# Allegro board seniordesignboard.brd
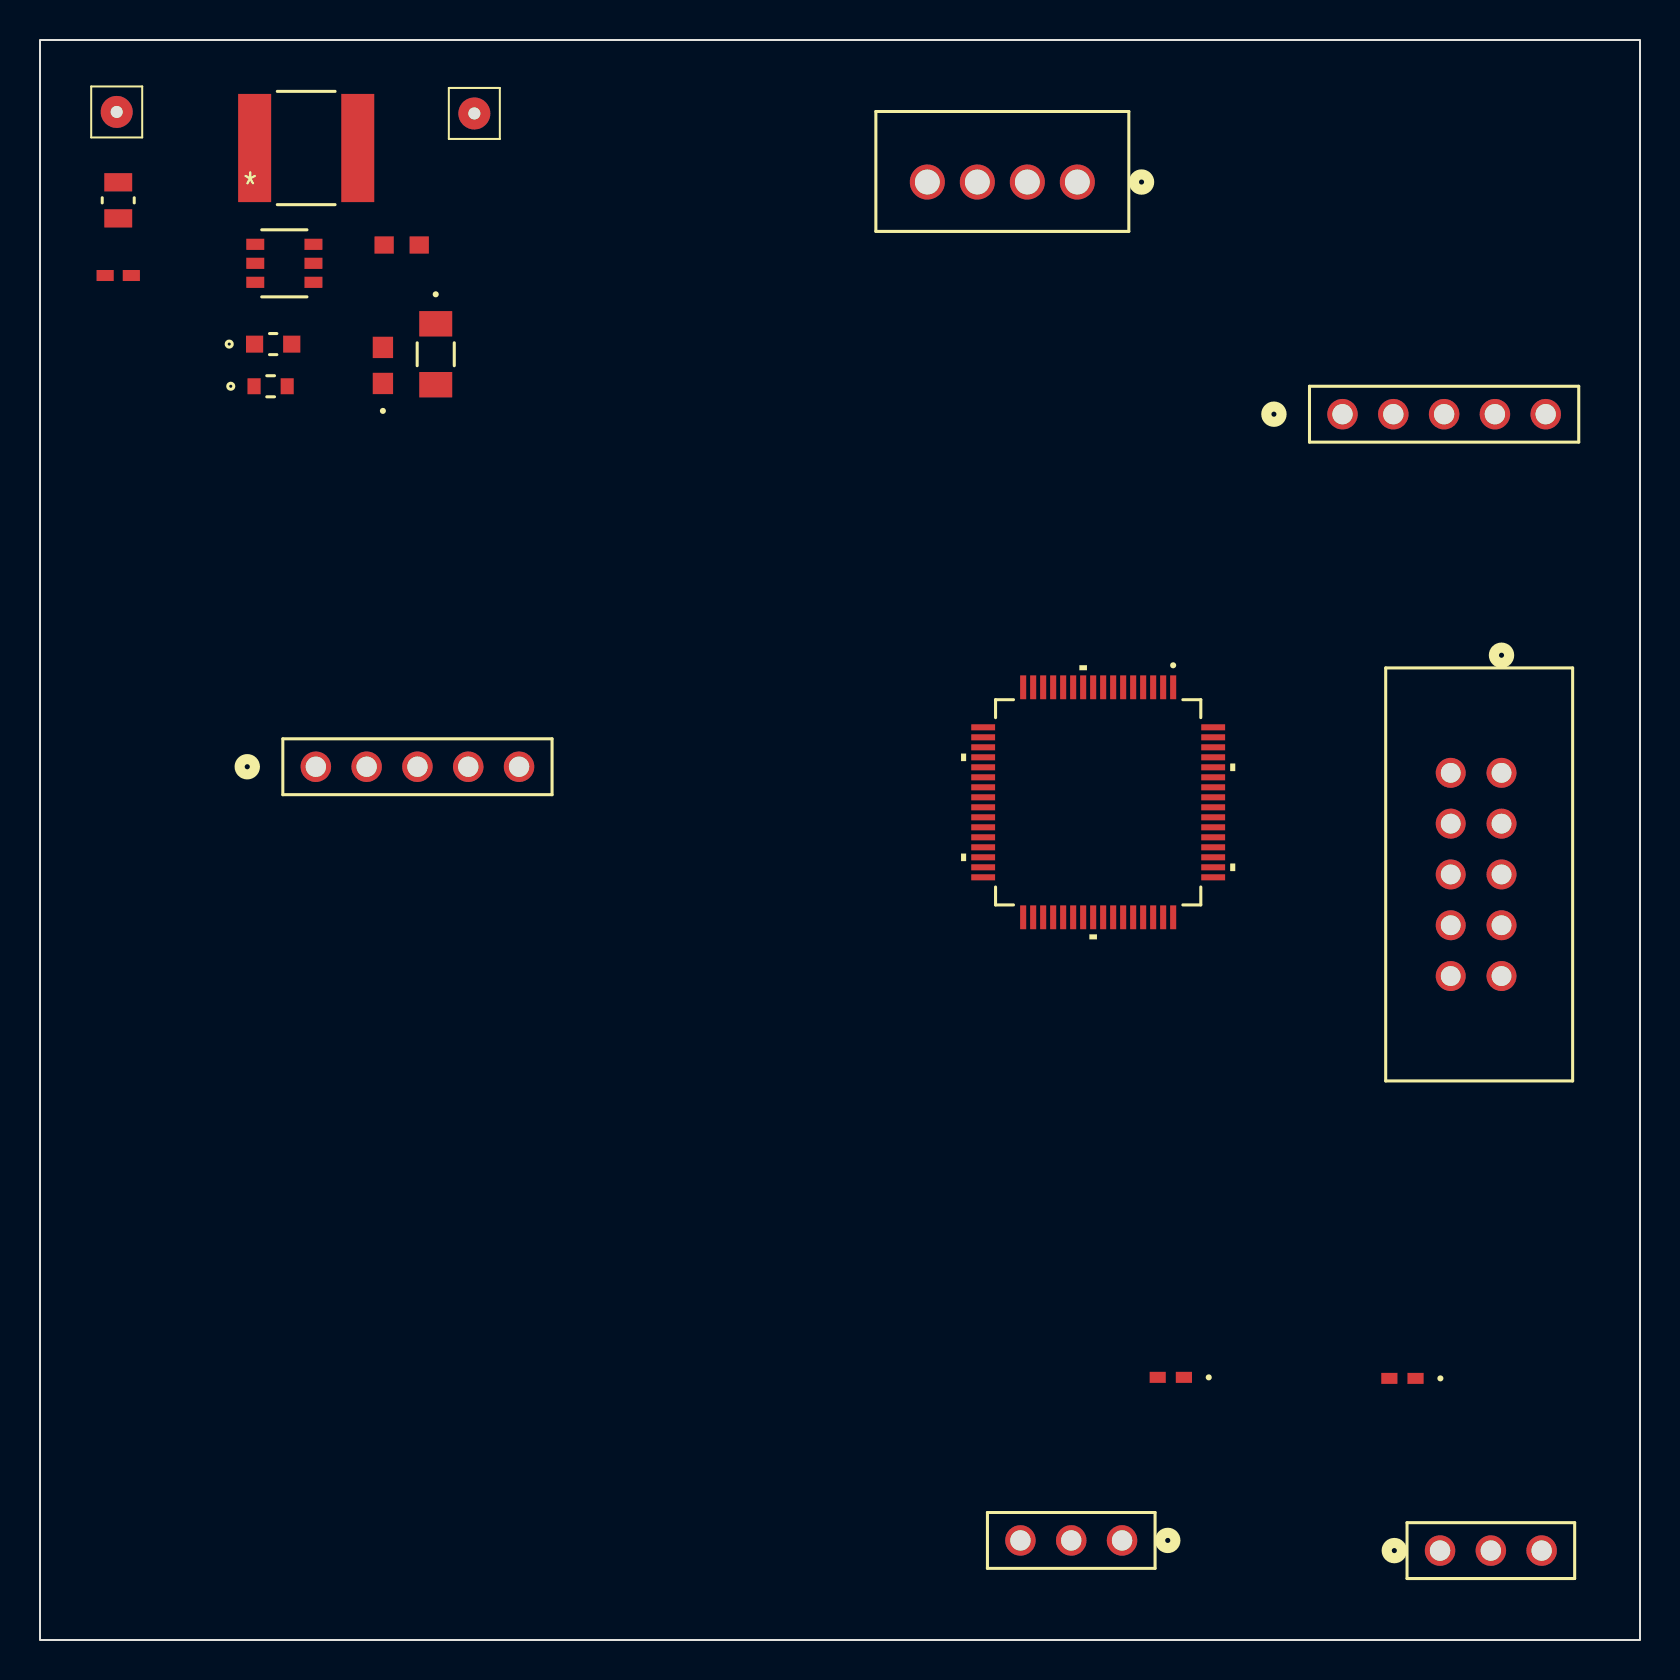
[diagram p0: board, top side]
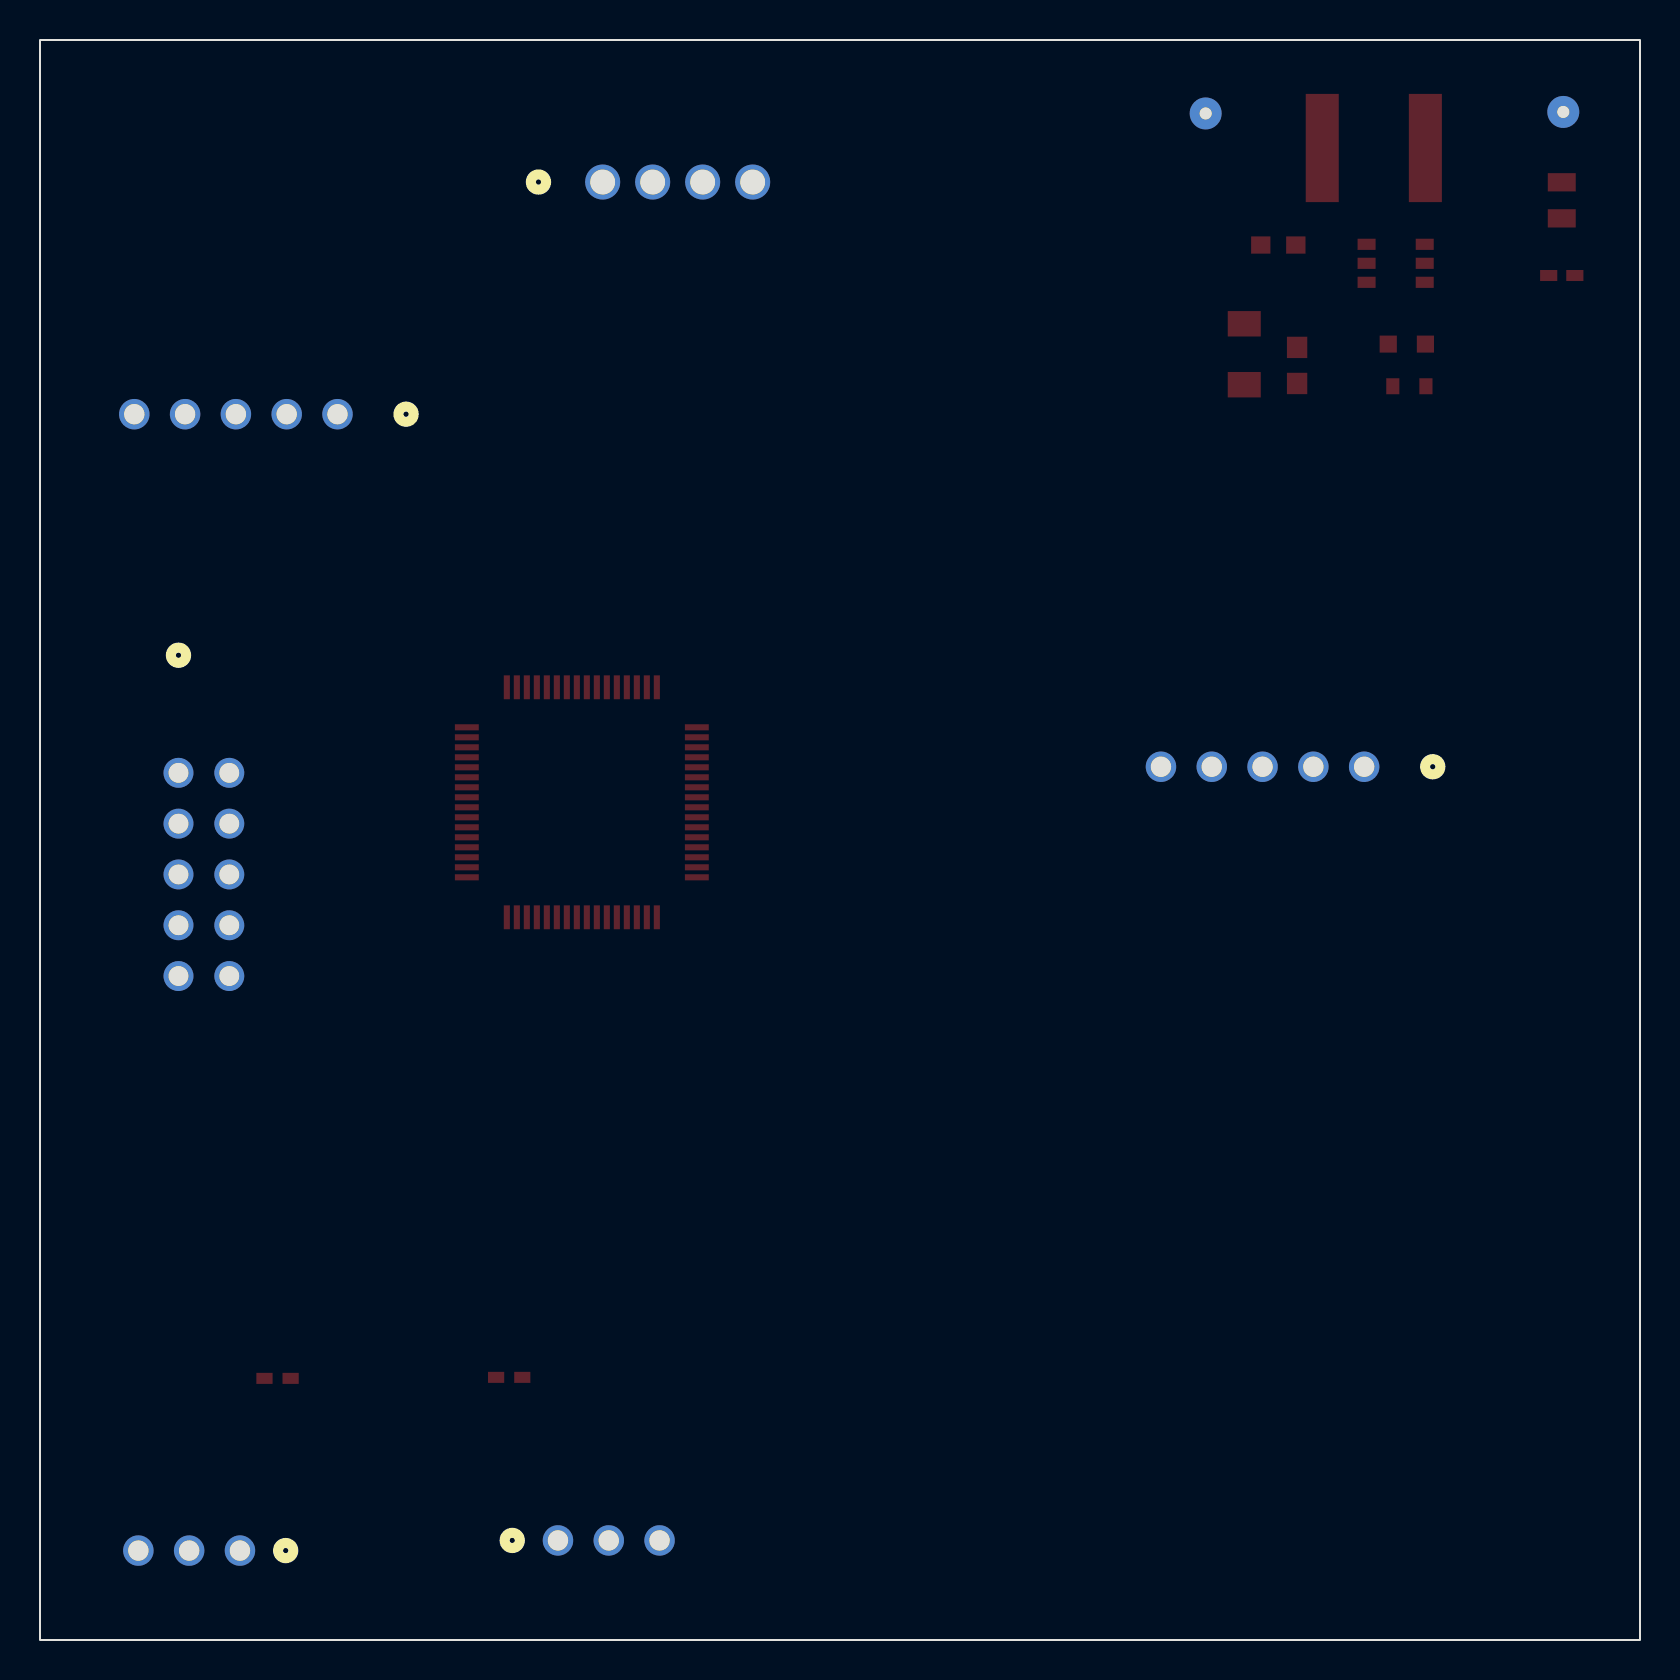
[diagram p1: board, bottom side, seen from below]

Outline 80 x 80 mm; copper layers: TOP, BOTTOM. Coordinates in mm from the lower left corner of the outline.
Outline path: rectangle 0,0 80,80

## Design rules (mm)
constraint set DEFAULT: min track width 0.305

## Placement (name value [footprint] x y rotation side)
C2  100n  [CAP_CL05_SAM-M]  68.12 13.08 180 top
C4  100n  [CAP_CL05_SAM-M]  56.54 13.13 180 top
C12  .1uf  [CAP_CL10_SAM-M]  11.66 64.8 0 top
C14  470pF  [CAP_0603G_AVX-M]  17.15 63.73 90 top
CANHEADER  CONN_B4B-XH-A  [CONN_B4B-XH-A_JST]  51.87 72.9 0 top
CIN  10uF  [CAP_NTS_55_2P8T_NIP]  13.31 74.6 180 top
COUT  10uf  [G-31_MUR-M]  19.79 64.29 270 top
GND  Battery-  [AMV_CON1]  21.72 76.33 0 top
GPSMODULE  CONN5_1LFBN-RC  [CONN5_1LFBN-RC_SUL]  13.79 43.66 0 top
JTAG  CONN_010P_000C_1  [CONN_SBH11-PBPC-D05-ST-BK_SUL]  73.08 43.36 270 top
L1  4.7uH  [IND_1608_TDK]  11.53 62.69 0 top
LORAMODULE  CONN5_1LFBN-RC  [CONN5_1LFBN-RC_SUL]  65.13 61.29 0 top
R2  4.7K  [RC0603N_YAG-M]  18.08 69.75 0 top
R4  5.1K  [RC0402N_PAN-M]  3.91 68.22 180 top
R5  30K  [RES_R0805_ROM-M]  3.91 71.98 270 top
SPEEDCONTROLLER  CONN_PPTC031  [CONN_PPTC031_SUL]  70 4.47 180 top
STEERINGSERVO  CONN_PPTC031  [CONN_PPTC031_SUL]  54.1 4.98 0 top
U2  STM32F4XXR2  [LQFP64-10X10MM]  52.91 41.88 270 top
U6  R1240N001x  [SOT-23-6W_PE-SOT23-6W-0512_NMD]  12.22 68.83 0 top
VIN  Battery+  [AMV_CON1]  3.84 76.4 0 top

## Library data of the parts
C2 C4 C12 C14 COUT = C: User Part Number: PN; Tolerance: TOL
CANHEADER = B4B-XH-A: User Part Number: PN; Tolerance: TOL
CIN = KTS500B106M55N0T00: User Part Number: PN; Tolerance: TOL
GND VIN = CON1
GPSMODULE LORAMODULE = PPTC051LFBN-RC: User Part Number: PN; Tolerance: TOL
JTAG = SBH11-PBPC-D05-ST-BK: User Part Number: PN; Tolerance: TOL
L1 = SLF7045T-4R7M2R0-PF: User Part Number: PN; Tolerance: TOL
R2 R4 R5 = R: User Part Number: PN; Tolerance: TOL
SPEEDCONTROLLER STEERINGSERVO = PPTC031LFBN-RC: User Part Number: PN; Tolerance: TOL
U2 = STM32F446RET6TR: User Part Number: PN; Tolerance: TOL
U6 = R1240N001B-TR-FE: User Part Number: PN; Tolerance: TOL

## Footprints (pads in the part's own frame, mm; a bottom-side part is the same pattern mirrored in y, then rotated)
AMV_CON1
  round 1.6 hole 0.6: 1(0,0)
CAP_0603G_AVX-M
  rect 1.067x1.016 smd: 1(-0.902,0) 2(0.902,0)
CAP_CL05_SAM-M
  rect 0.809x0.551 smd: 1(-0.654,0) 2(0.654,0)
CAP_CL10_SAM-M
  rect 0.859x0.851 smd: 1(-0.929,0) 2(0.929,0)
CAP_NTS_55_2P8T_NIP
  rect 1.651x5.41 smd: 1(-2.578,0) 2(2.578,0)
CONN5_1LFBN-RC_SUL
  round 1.524 hole 1.016: 1(0,0) 2(2.54,0) 3(5.08,0) 4(7.62,0) 5(10.16,0)
CONN_B4B-XH-A_JST
  round 1.753 hole 1.245: 1(0,0) 2(-2.5,0) 3(-5,0) 4(-7.5,0)
CONN_PPTC031_SUL
  round 1.524 hole 1.016: 1(0,0) 2(-2.54,0) 3(-5.08,0)
CONN_SBH11-PBPC-D05-ST-BK_SUL
  round 1.499 hole 0.991: 1(0,0) 2(0,-2.54) 3(2.54,0) 4(2.54,-2.54) 5(5.08,0) 6(5.08,-2.54) 7(7.62,0) 8(7.62,-2.54) 9(10.16,0) 10(10.16,-2.54)
G-31_MUR-M
  rect 1.27x1.651 smd: 1(-1.524,0) 2(1.524,0)
IND_1608_TDK
  rect 0.656x0.8 smd: 1(-0.828,0) 2(0.828,0)
LQFP64-10X10MM
  rect 1.194x0.305 smd: 1(-5.75,3.75) 2(-5.75,3.25) 3(-5.75,2.75) 4(-5.75,2.25) 5(-5.75,1.75) 6(-5.75,1.25) 7(-5.75,0.75) 8(-5.75,0.25) 9(-5.75,-0.25) 10(-5.75,-0.75) 11(-5.75,-1.25) 12(-5.75,-1.75) 13(-5.75,-2.25) 14(-5.75,-2.75) 15(-5.75,-3.25) 16(-5.75,-3.75) 33(5.75,-3.75) 34(5.75,-3.25) 35(5.75,-2.75) 36(5.75,-2.25) 37(5.75,-1.75) 38(5.75,-1.25) 39(5.75,-0.75) 40(5.75,-0.25) 41(5.75,0.25) 42(5.75,0.75) 43(5.75,1.25) 44(5.75,1.75) 45(5.75,2.25) 46(5.75,2.75) 47(5.75,3.25) 48(5.75,3.75)
  rect 0.305x1.194 smd: 17(-3.75,-5.75) 18(-3.25,-5.75) 19(-2.75,-5.75) 20(-2.25,-5.75) 21(-1.75,-5.75) 22(-1.25,-5.75) 23(-0.75,-5.75) 24(-0.25,-5.75) 25(0.25,-5.75) 26(0.75,-5.75) 27(1.25,-5.75) 28(1.75,-5.75) 29(2.25,-5.75) 30(2.75,-5.75) 31(3.25,-5.75) 32(3.75,-5.75) 49(3.75,5.75) 50(3.25,5.75) 51(2.75,5.75) 52(2.25,5.75) 53(1.75,5.75) 54(1.25,5.75) 55(0.75,5.75) 56(0.25,5.75) 57(-0.25,5.75) 58(-0.75,5.75) 59(-1.25,5.75) 60(-1.75,5.75) 61(-2.25,5.75) 62(-2.75,5.75) 63(-3.25,5.75) 64(-3.75,5.75)
RC0402N_PAN-M
  rect 0.859x0.551 smd: 1(-0.654,0) 2(0.654,0)
RC0603N_YAG-M
  rect 0.965x0.864 smd: 1(-0.876,0) 2(0.876,0)
RES_R0805_ROM-M
  rect 0.914x1.397 smd: 1(-0.902,0) 2(0.902,0)
SOT-23-6W_PE-SOT23-6W-0512_NMD
  rect 0.902x0.559 smd: 1(-1.454,0.95) 2(-1.454,0) 3(-1.454,-0.95) 4(1.454,-0.95) 5(1.454,0) 6(1.454,0.95)

## Nets
3.3V: C2.2 C4.1 C14.1 COUT.2 GPSMODULE.1 JTAG.3 JTAG.5 JTAG.9 L1.2 SPEEDCONTROLLER.1 STEERINGSERVO.1
GND: CIN.1
0: C2.1 C4.2 CANHEADER.1 GND.1 GPSMODULE.2 JTAG.1 LORAMODULE.5 R2.2 SPEEDCONTROLLER.3 STEERINGSERVO.3 U6.5
ADC: R5.2 U2.16
PA13 TMS: JTAG.10 U2.46
PA14 TCLK: U2.49
PA14TCLK: JTAG.8
PA15 TDI: JTAG.4 U2.50
PB3 TBO: JTAG.6 U2.55
RESET: JTAG.2 U2.7
N04277: GPSMODULE.3 U2.26
N04281: GPSMODULE.4 U2.52
N04285: GPSMODULE.5 U2.51
N04355: SPEEDCONTROLLER.2 U2.41
N04395: STEERINGSERVO.2 U2.37
N04429: LORAMODULE.1
N04477: LORAMODULE.2 U2.14
N04485: LORAMODULE.3 U2.15
N04755: U2.44
N04759: U2.43
N04763: U2.45
N04855: CANHEADER.4
N17576: C14.2 R2.1 U6.6
N17942: U6.4
N18028: C12.1 L1.1 U6.3
N24517: LORAMODULE.4 U2.17
N24691: CANHEADER.3
N24886: CANHEADER.2
N055670: R4.2 U6.1
N061071: C12.2
N068040: COUT.1
N088060: CIN.2 R4.1 R5.1 U6.2(VIN) VIN.1

Pads without a net: JTAG 7; U2 1 2 3 4 5 6 8 9 10 11 12 13 18 19 20 21 22 23 24 25 27 28 29 30 31 32 33 34 35 36 38 39 40 42 47 48 53 54 56 57 58 59 60 61 62 63 64
